# Altium PCB Multi_HITSCHIENE_POE.PcbDoc
Units mm, origin at the board's own origin, x right, y up, seen from the top; angles counter-clockwise.
Board outline 41.5 x 56.72 mm, 2 copper layers (Top Layer, Bottom Layer); 11 components, 6 nets, 27 pads, 58 vias.
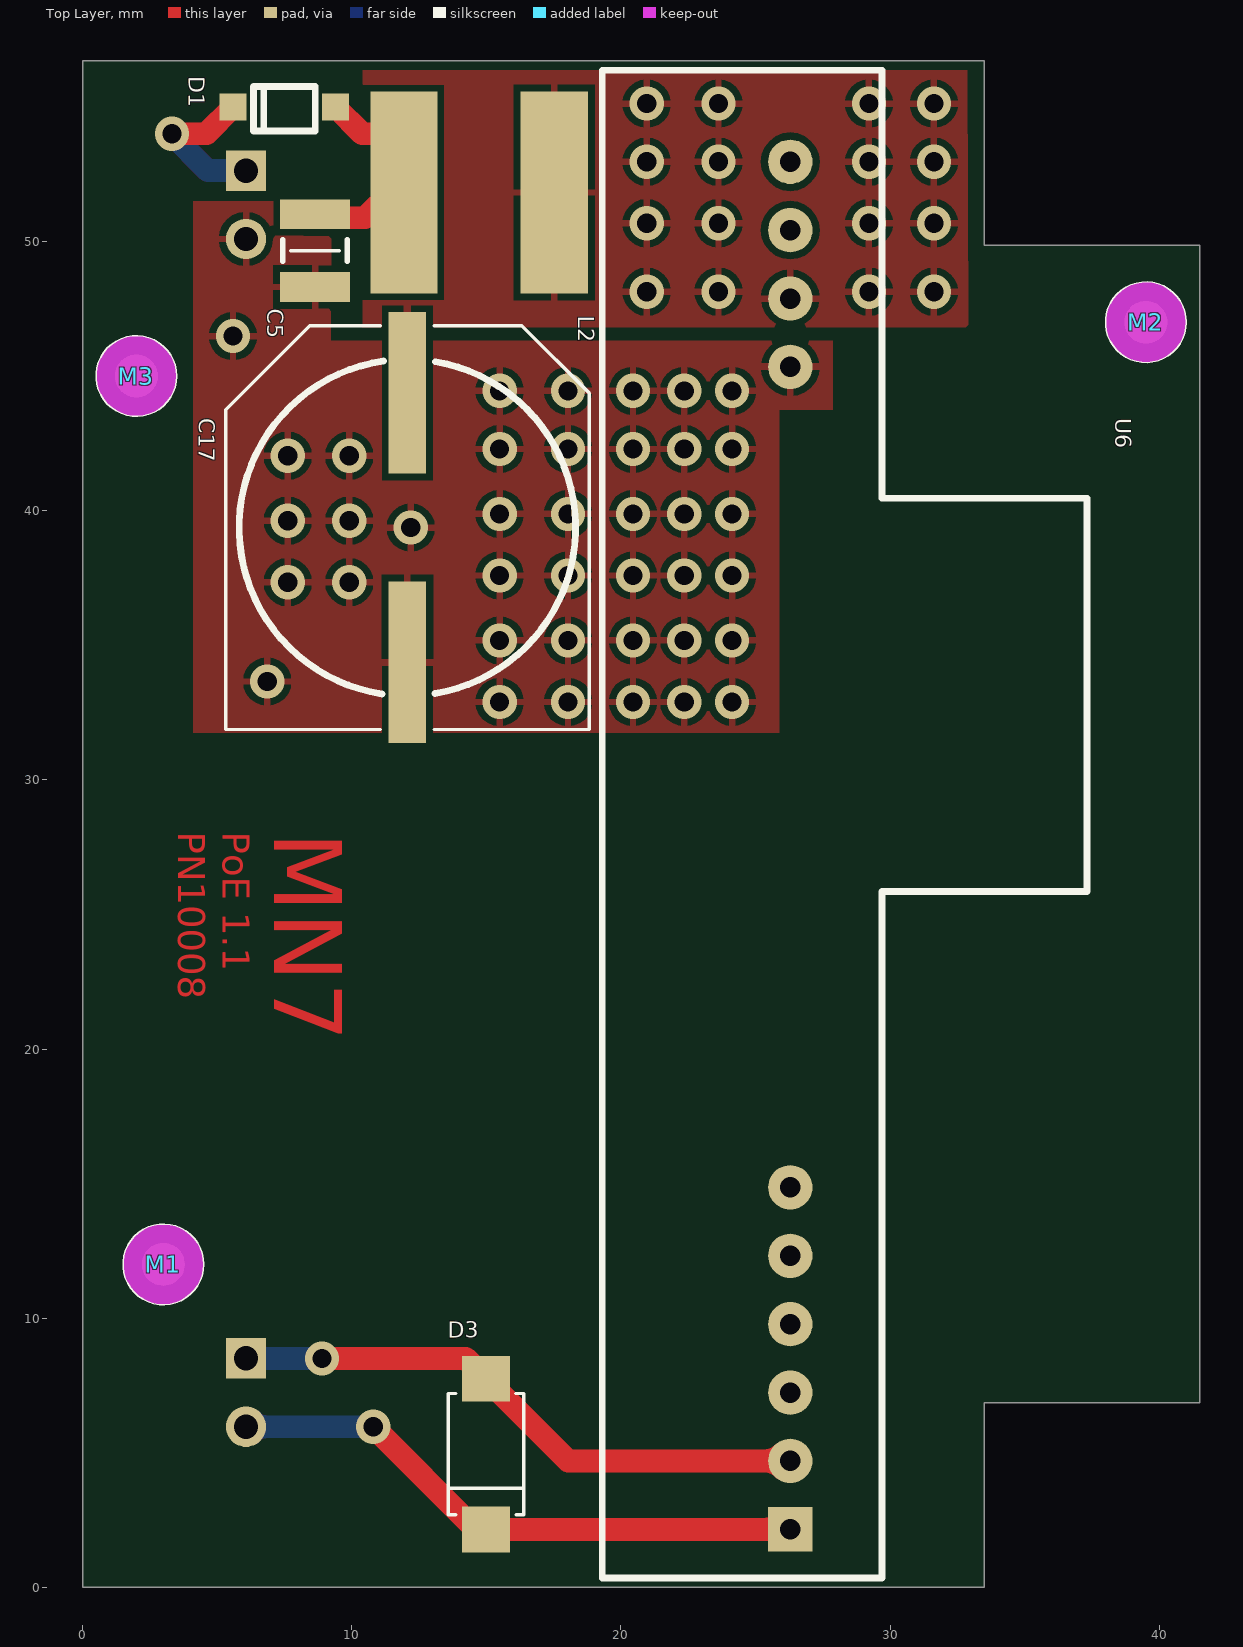
[diagram p0: Top Layer view]
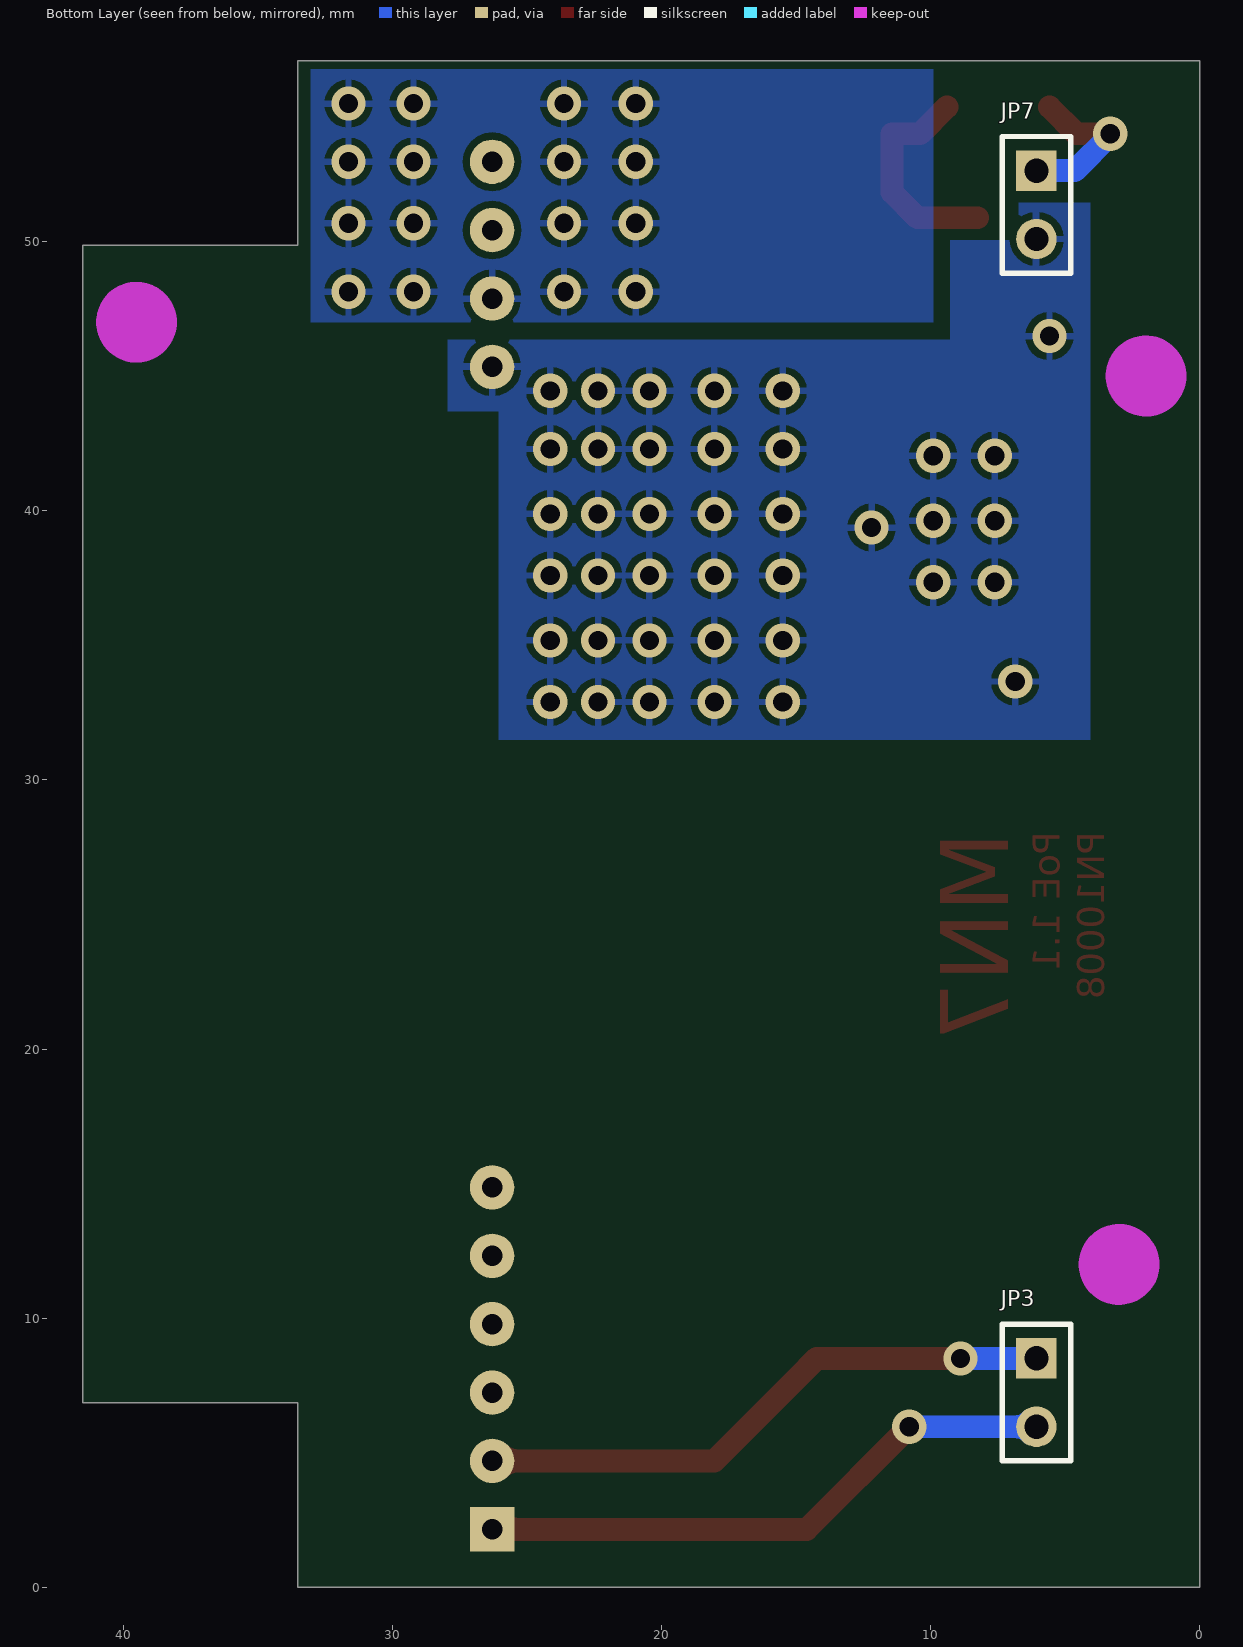
[diagram p1: Bottom Layer view, seen from below]

## Layer stack, top to bottom
Top Solder: solder mask 0.0102, Solder Resist, Dk 3.5
Top Layer: signal copper 0.0356
Dielectric 1: dielectric 0.32, FR-4, Dk 4.8
Bottom Layer: signal copper 0.0356
Bottom Solder: solder mask 0.0102, Solder Resist, Dk 3.5

## Board outline
0,0 33.503,0 33.503,6.858 41.504,6.858 41.504,49.86 33.503,49.86 33.503,56.718 0,56.718

## Design rules (kind name [scope] priority, off if disabled: settings)
Clearance [All] p1: gap=0.254
ComponentClearance [All] p1: gap=0 collisioncheckmode=3 verticalgap=0 showdistances=TRUE
PolygonConnect [All] p1: connectstyle=Relief reliefconductorwidth=0.254 reliefentries=4 polygonreliefangle="90 Angle" airgapwidth=0.254
RoomDefinition Multi_HITSCHIENE_POE [InComponentClass('Multi_HITSCHIENE_POE')] p1: confinementstyle=ConfineIn formatcopy=TRUE lockcomponents=FALSE outline -7.747,-8.128 50.165,-8.128 50.165,62.357 -7.747,62.357
RoutingVias [All] p1: holewidth=0.711 width=1.27 viastyle="Through Hole" minholewidth=0.711 minwidth=1.27 maxholewidth=0.711 maxwidth=1.27
SilkToBoardRegionClearance [(HasFootprint('Mark-3mm') AND IsEmbeddedBoard)] p1:
SilkToSolderMaskClearance [IsPad] p1: minsilkscreentomaskgap=0.04 clearancetoexposedcopper=TRUE
SolderMaskExpansion [All] p1: expansion=0.102
Width [All] p1: maxlimit=1 minlimit=0.254 preferedwidth=0.85
26 further rules are at their usual default settings.

## Components (designator, comment, footprint, x,y, rotation, side; value= is the part's Value field where it differs from the comment)
C5 "10uF50V_1210" C1210 8.636,49.657 r270 top
C17 "470uF25V_POL" Panasonic-H13 12.065,39.37 r90 top
D1 "RB160M-30TR" SOD123 7.493,54.991 r180 top
D3 "SMAJ58A-E3/61" DO214A 14.986,4.953 r270 top
JP3 "Header-2" HDR1X2-down 6.071,7.239 r270 bottom
JP7 "Header-2" HDR1X2-down 6.071,51.359 r270 bottom
L2 "10uF2A" WE-PD2_1 14.732,51.816 r180 top
M1 "Mark" Mark-3mm 3,12 r0 top
M2 "Mark" Mark-3mm 39.5,47 r0 top
M3 "Mark" Mark-3mm 2,45 r0 top
U6 "AG-9412-S" AG-9412-S-1 26.289,2.159 r90 top

## Footprints (in the part's own frame and the unit in brackets; to place one, negate y for a bottom-side part, rotate by r counter-clockwise, add the part's x,y. Pads: shape width x height; smd on the part's side, far side on the other; paste and mask are expansions set on the pad)
AG-9412-S-1 [mm]
  rect 1.65x1.65 hole 0.762: 1(0,0)
  round 1.65 hole 0.762: 2(2.54,0) 3(5.08,0) 4(7.62,0) 5(10.16,0) 6(12.7,0) 7(43.18,0) 8(45.72,0) 9(48.26,0) 10(50.8,0)
  silkscreen extent -1.81,-11.02 54.2,6.98, body extent -1.8,-11 54.25,7, height 14
C1210 [mm] "Chip Capacitor, Body 3.2x2.5mm, IPC High Density"
  rect 1.1x2.6 smd: 1(-1.35,0) 2(1.35,0)
  silkscreen extent -0.4,-1.2 0.4,1.2, body extent -1.7,-1.35 1.7,1.35, height 1.3
DO214A [mm] "Diode; 2 Leads"
  rect 1.7x1.8 smd: 1(2.8,0) 2(-2.8,0)
  silkscreen extent -2.25,-1.4 2.25,1.4, body extent -2.25,-1.4 2.25,1.4, height 2.3
HDR1X2-down [mm] "Connector; Header; 2 Position"
  rect 1.5x1.5 hole 0.9: 1(-1.27,0)
  round 1.5 hole 0.9: 2(1.27,0)
  silkscreen extent -2.54,-1.27 2.54,1.27, body extent -2.54,-1.27 2.54,5.08, height 2
Mark-3mm [mm]
  round 1.6 smd paste-2: 0(0,0)
  Keep-Out Layer circle w2: c0,0 r0.5
  silkscreen extent -1.5,-1.5 1.5,1.5
Panasonic-H13 [mm] "SMD electrolytic, Panasonic"
  rect 6x1.4 smd: 1(5,0) 2(-5,0)
  silkscreen extent -7.5,-6.75 7.5,6.75, body extent -7.5,-6.75 7.5,6.75, height 13
SOD123 [mm]
  rect 1x1 smd: 1(1.905,0) 2(-1.905,0)
  silkscreen extent -1.15,-0.76 1.14,0.89, body extent -1.52,-0.85 1.52,0.85, height 1.4
WE-PD2_1 [mm]
  rect 2.5x7.5 smd: 1(-2.794,0) 2(2.794,0)
  body extent -3.9,-3.49 3.89,3.49, height 5

## Part data
C5: "AVX,  X7R, 10%, 50V"
C17: "Panasonic, TG series"
D1: "Diode Schottky,2A,40V"
D3: "TVS, 400W, 58V"
JP3 JP7: "Header, 5-Pin"
L2: library part 10uF2A_WE-PD2, "WE-PD2, 10uF2A"
U6: "PoE, 12V"

## Via types
v1: diameter 1.27, hole 0.711, Top Layer to Bottom Layer, 58 vias

## Nets (pads, with @x,y where several pads share a name; then routed paths per layer and width w, separated by ;. In a path a pad name is that pad's centre, name@x,y a point inside that pad or via, vN(x,y) a via of type N, cw(c..) or ccw(c..) an arc to the next point about the centre after c; other vN are vias at no path point)
GND: C5.2 C17.2 JP7.2 U6.7
  other v1: 15.494,32.893 18.034,32.893 20.447,32.893 22.352,32.893 24.13,32.893 6.858,33.655 15.494,35.179 18.034,35.179 20.447,35.179 22.352,35.179 24.13,35.179 7.62,37.338 9.906,37.338 15.494,37.592 18.034,37.592 20.447,37.592 22.352,37.592 24.13,37.592 12.192,39.37 7.62,39.624 9.906,39.624 15.494,39.878 18.034,39.878 20.447,39.878 22.352,39.878 24.13,39.878 7.62,42.037 9.906,42.037 15.494,42.291 18.034,42.291 20.447,42.291 22.352,42.291 24.13,42.291 15.494,44.45 18.034,44.45 20.447,44.45 22.352,44.45 24.13,44.45 5.588,46.482
NetC5_1: C5.1 D1.2 L2.2 | length 8.2
  Top Layer w0.85: C5.1@8.255,50.88 10.494,50.88 11.43,51.816 11.43,54 10.389,54 D1.2
NetC17_1: C17.1 L2.1 U6.8
  other v1: 20.955,48.133 23.622,48.133 29.21,48.133 31.623,48.133 20.955,50.673 23.622,50.673 29.21,50.673 31.623,50.673 20.955,52.959 23.622,52.959 29.21,52.959 31.623,52.959 20.955,55.118 23.622,55.118 29.21,55.118 31.623,55.118
NetD1_1: D1.1 JP7.1 | length 7.3
  Top Layer w0.85: v1@3.302,53.975 v1(3.327,54) 4.597,54 D1.1
  Bottom Layer w0.85: v1@3.302,53.975 4.648,52.629 JP7.1 ; JP7.1@5.841,52.399 ccw(c5.286,51.844) 5.286,52.629 ccw(c5.286,53.414) JP7.1@5.841,52.859
NetD3_1: D3.1 JP3.2 U6.1 | length 24.6
  Top Layer w0.85: v1(10.795,5.969) 14.611,2.153 D3.1 26.283,2.153 U6.1 ; 25.309,2.153 ccw(c25.309,3.139) U6.1@26.006,2.442 ; 25.338,2.153 cw(c25.338,1.208) U6.1@26.006,1.876
  Bottom Layer w0.85: JP3.2 v1(10.795,5.969) ; JP3.2@6.301,5.739 cw(c6.856,5.184) 6.856,5.969 cw(c6.856,6.754) JP3.2@6.301,6.199
NetD3_2: D3.2 JP3.1 U6.2 | length 24.5
  Top Layer w0.85: v1(8.89,8.509) 14.23,8.509 D3.2 18.04,4.699 U6.2 ; U6.2@26.006,4.416 ccw(c25.323,3.733) 25.323,4.699 ccw(c25.323,5.665) U6.2@26.006,4.982
  Bottom Layer w0.85: JP3.1 v1(8.89,8.509) ; JP3.1@6.301,8.279 cw(c6.856,7.724) 6.856,8.509 cw(c6.856,9.294) JP3.1@6.301,8.739
pads on no net: M1.0 M2.0 M3.0 U6.3 U6.4 U6.5 U6.6 U6.9 U6.10

## Polygon pours and split planes (outlines as drawn)
GND on Top Layer "GND" (solid, remove dead copper, pour order 6): 27.864,46.304 9.221,46.304 9.246,51.486 4.115,51.486 4.115,31.75 25.883,31.75 25.883,43.739 27.864,43.739
NetC17_1 on Top Layer "Top-POE_VDC" (solid, remove dead copper, pour order 2): 10.414,56.363 32.868,56.363 32.893,46.812 10.414,46.812
GND on Bottom Layer "GND-B" (solid, pour order 5): 4.064,51.435 6.731,51.435 6.731,50.038 9.144,50.038 9.271,50.038 9.271,46.355 27.813,46.355 27.94,46.355 27.94,43.688 25.908,43.688 26.035,43.688 26.035,31.75 26.035,31.496 4.064,31.496 4.064,51.435
NetC17_1 on Bottom Layer "Vcc" (solid, pour order 9): 33.02,46.99 9.906,46.99 9.906,56.388 33.02,56.388

## Other copper
Top Layer:
  text "PN10008" at 3.556,28.067 h1 r270
  text "PoE 1.1" at 5.207,28.067 h1 r270
  text "MN7" at 7.112,28.067 h2.54 r270

## Silkscreen, mask and mechanical layers (free items; w line width, h text height)
Top Solder:
  text "MN7" at 7.112,28.067 h2.54 r270
Outline:
  the board outline again, w0.254